# Altium PCB DRLDelay.PcbDoc
Units mm, origin at the board's own origin, x right, y up, seen from the top; angles counter-clockwise.
Board outline 152.4 x 101.6 mm, 2 copper layers (Top Layer, Bottom Layer); 10 components, 10 nets, 36 pads, 0 vias.
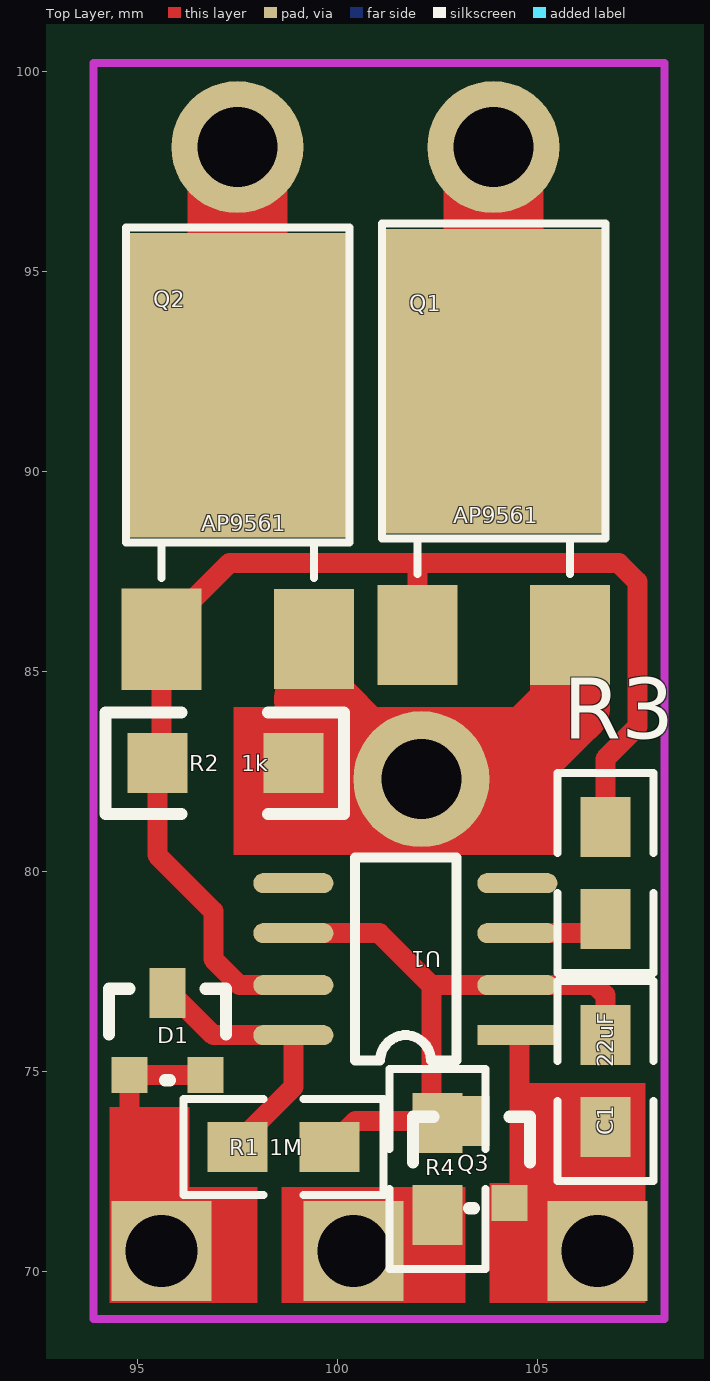
[diagram p0: Top Layer view]
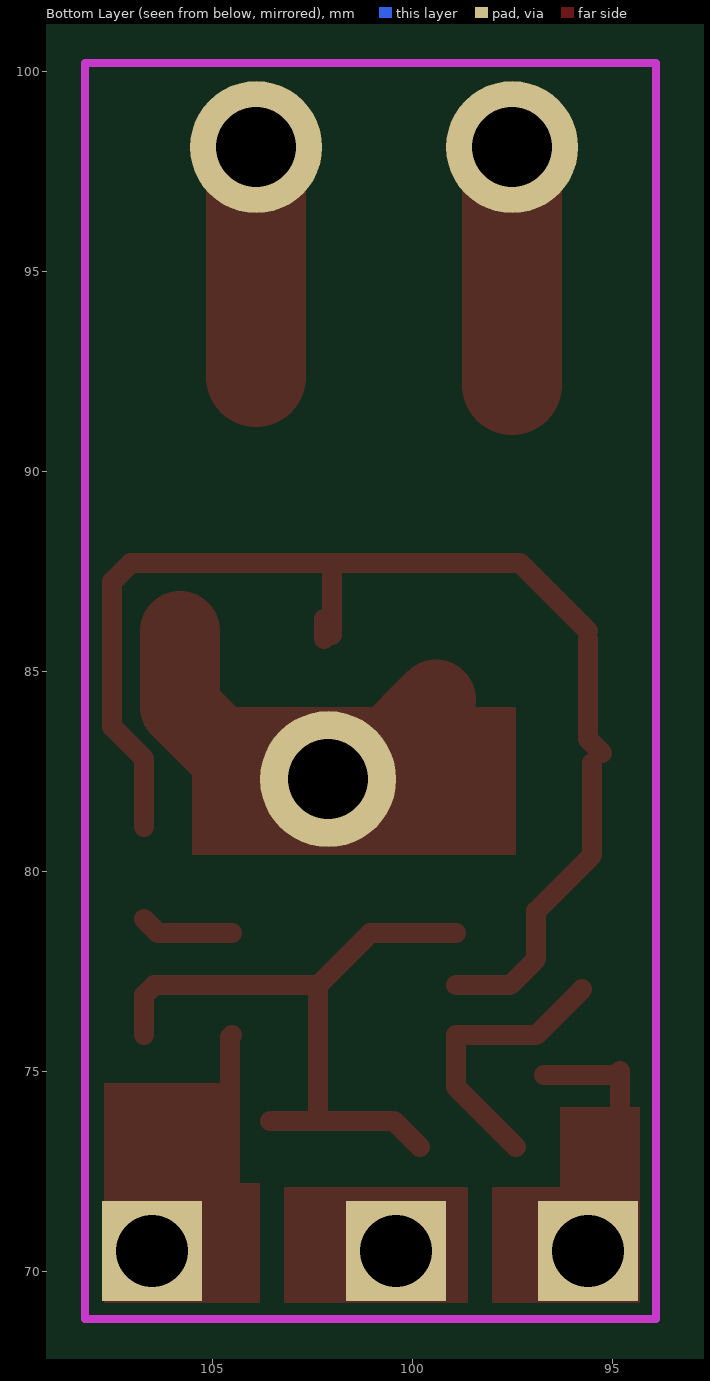
[diagram p1: Bottom Layer view, seen from below]

## Layer stack, top to bottom
Top Layer: signal copper 0.0356
Dielectric: dielectric 0.32, FR-4, Dk 4.8
Bottom Layer: signal copper 0.0356

## Board outline
25.4,25.4 177.8,25.4 177.8,127 25.4,127

## Design rules (kind name [scope] priority, off if disabled: settings)
Clearance [All] p1: gap=0.3
ComponentClearance [All] p1 off: gap=0 collisioncheckmode=3 verticalgap=0.254 showdistances=FALSE
PolygonConnect [All] p1: connectstyle=Relief reliefconductorwidth=0.254 reliefentries=4 polygonreliefangle="90 Angle"
RoutingVias [All] p1: holewidth=0.711 width=1.27 viastyle="Through Hole" minholewidth=0.711 minwidth=1.27 maxholewidth=0.711 maxwidth=1.27
SilkscreenOverComponentPads [All] p1: minsilkscreentomaskgap=0.254
SolderMaskExpansion [All] p1: expansion=0.102
Width [All] p1: maxlimit=5 minlimit=0.25 preferedwidth=0.25
26 further rules are at their usual default settings.

## Components (designator, comment, footprint, x,y, rotation, side; value= is the part's Value field where it differs from the comment)
C1 "22uF" 0805 106.7,75.9 r270 top
D1 "BAV70" SOT-23 94.8,74.9 r0 top
Q1 "AP9561" D-Pack#1 102,85.9 r90 top
Q2 "AP9561" D-Pack#2 95.6,85.8 r90 top
Q3 "DTC114YKAT" SOT-23 102.4,71.7 r0 top
R1 "1M" 0805 97.5,73.1 r0 top
R2 "1k" 1206 98.9,82.7 r180 top
R3 "0" 0805 106.7,78.8 r90 top
R4 "0" 0805 102.5,71.4 r90 top
U1 "NE555" SO-8 104.5,75.9 r180 top

## Footprints (in the part's own frame and the unit in brackets; to place one, negate y for a bottom-side part, rotate by r counter-clockwise, add the part's x,y. Pads: shape width x height; smd on the part's side, far side on the other; paste and mask are expansions set on the pad)
0805 [mm]
  rect 1.5x1.25 smd: 1(0,0) 2(2.3,0)
  silkscreen extent -1.35,-1.2 3.65,1.2
1206 [mm]
  rect 1.5x1.5 smd: 1(0,0) 2(3.4,0)
  silkscreen extent -1.27,-1.27 4.7,1.27
D-Pack#1 [mm]
  rect 2.5x2 smd: 1(0,0) 3(0,-3.81)
  rect 7.62x5.588 smd: 2(6.35,-1.905)
  silkscreen extent 1.52,-4.7 10.29,0.89
D-Pack#2 [mm]
  rect 2.54x2 smd: 1(0,0)
  rect 7.62x5.588 smd: 2(6.35,-1.905)
  rect 2.5x2 smd: 3(0,-3.81)
  silkscreen extent 1.52,-4.7 10.29,0.89
SO-8 [mm]
  rect 2x0.5 smd: 1(0,0)
  oval 2x0.5 smd: 2(0,-1.25) 3(0,-2.55) 4(0,-3.8) 5(5.6,-3.8) 6(5.6,-2.55) 7(5.6,-1.25) 8(5.6,0)
  silkscreen extent 1.52,-4.44 4.06,0.64
SOT-23 [mm]
  rect 0.9x0.9 smd: 1(0,0) 3(1.9,0)
  rect 0.9x1.25 smd: 2(0.95,2.05)
  silkscreen extent -0.51,-0.13 2.41,2.16

## Part data
C1: library part CAP, "Capacitor"
D1: library part "DUAL DIODE BAV70"
Q1 Q2: library part "MOSFET P"
Q3: library part NPN1, "NPN Transistor"
R1 R2 R3 R4: library part Res1, "Resistor"
U1: "Timer 555"

## Free pads (board coordinates)
  rect 2.5x2.5 hole 1.8: 0(95.6,70.5) 0(100.4,70.5) 0(106.5,70.5)
  round 3.3 hole 2: 0(97.5,98.1) 0(103.9,98.1)
  round 3.4 hole 2: 0(102.1,82.3)

## Nets (pads, with @x,y where several pads share a name; then routed paths per layer and width w, separated by ;. In a path a pad name is that pad's centre, name@x,y a point inside that pad or via, vN(x,y) a via of type N, cw(c..) or ccw(c..) an arc to the next point about the centre after c; other vN are vias at no path point)
ACC: D1.1 D1.3 pad.0@95.6,70.5 | length 3.1
  Top Layer w0.5: 94.8,73.8 D1.1@94.8,75 ; D1.1 D1.3
GABARIT: pad.0@100.4,70.5 Q3.1 R4.1
GATE: Q1.1 Q2.1 R2.2 R3.2 U1.7 | length 32.2
  Top Layer w0.5: R2.2@95.25,82.95 95.6,83.3 Q2.1 ; R2.2 95.5,80.4 96.9,79 96.9,77.8 97.55,77.15 U1.7 ; Q2.1@95.6,86 97.3,87.7 107.038,87.7 107.5,87.238 107.5,83.608 106.7,82.808 R3.2 ; Q1.1 102,87.6 ; Q1.1@102.2,85.8 Q1.1@102.2,86.3
L: pad.0@97.5,98.1 Q2.2 | length 6
  Top Layer w2.5: pad.0@97.5,98.1 97.5,92.155 Q2.2
NetD1_2: D1.2 R1.1 U1.8 | length 7
  Top Layer w0.5: D1.2@95.75,77.05 96.9,75.9 U1.8 98.9,74.6 R1.1@97.4,73.1
NetR3_1: R3.1 U1.3 | length 2.3
  Top Layer w0.5: U1.3 106.35,78.45 R3.1
PGND: C1.2 pad.0@106.5,70.5 Q3.3 U1.1 | length 6.3
  Top Layer w0.5: U1.1 104.55,75.85 104.55,73.6 ; Q3.3@104.55,71.75 104.55,73.6 ; C1.2 104.55,73.6
POWER: pad.0@102.1,82.3 Q1.3 Q2.3 R2.1 | length 9.3
  Top Layer w2: 99.41,84.29 100.7,83 104.7,83 105.81,84.11 Q1.3@105.81,86
R: pad.0@103.9,98.1 Q1.2 | length 5.8
  Top Layer w2.5: pad.0@103.9,98.1 103.9,92.355 Q1.2@103.905,92.35
TRIG: C1.1 Q3.2 R1.2 R4.2 U1.2 U1.6 | length 16.8
  Top Layer w0.5: U1.6 101.05,78.45 102.35,77.15 ; R1.2 100.45,73.75 Q3.2@103.55,73.75 ; R4.2@102.35,73.85 102.35,77.15 ; C1.1 106.7,76.9 106.45,77.15 U1.2 102.35,77.15
pads on no net: U1.4 U1.5

## Keep-outs
Keep-Out Layer:
  lines w0.2: 93.9,68.8 93.9,100.2 108.175,100.2 108.175,68.8 93.9,68.8

## Other copper
Top Layer:
  region net POWER: 97.4,84.1 97.4,80.4 105.5,80.4 105.5,84.1
  region net PGND: 104.8,74.7 104.8,71.9 107.7,71.9 107.7,74.7
  region net ACC: 96.3,74.1 94.3,74.1 94.3,71.1 96.3,71.1
  region net ACC: 98,69.2 98,72.1 94.3,72.1 94.3,69.2
  region net PGND: 107.7,69.2 107.7,72.2 103.8,72.2 103.8,69.2
  region net GABARIT: 103.2,69.2 103.2,72.1 98.6,72.1 98.6,69.2